# EAGLE board Underneath IR Matrix (EAGLE 9.6.2)
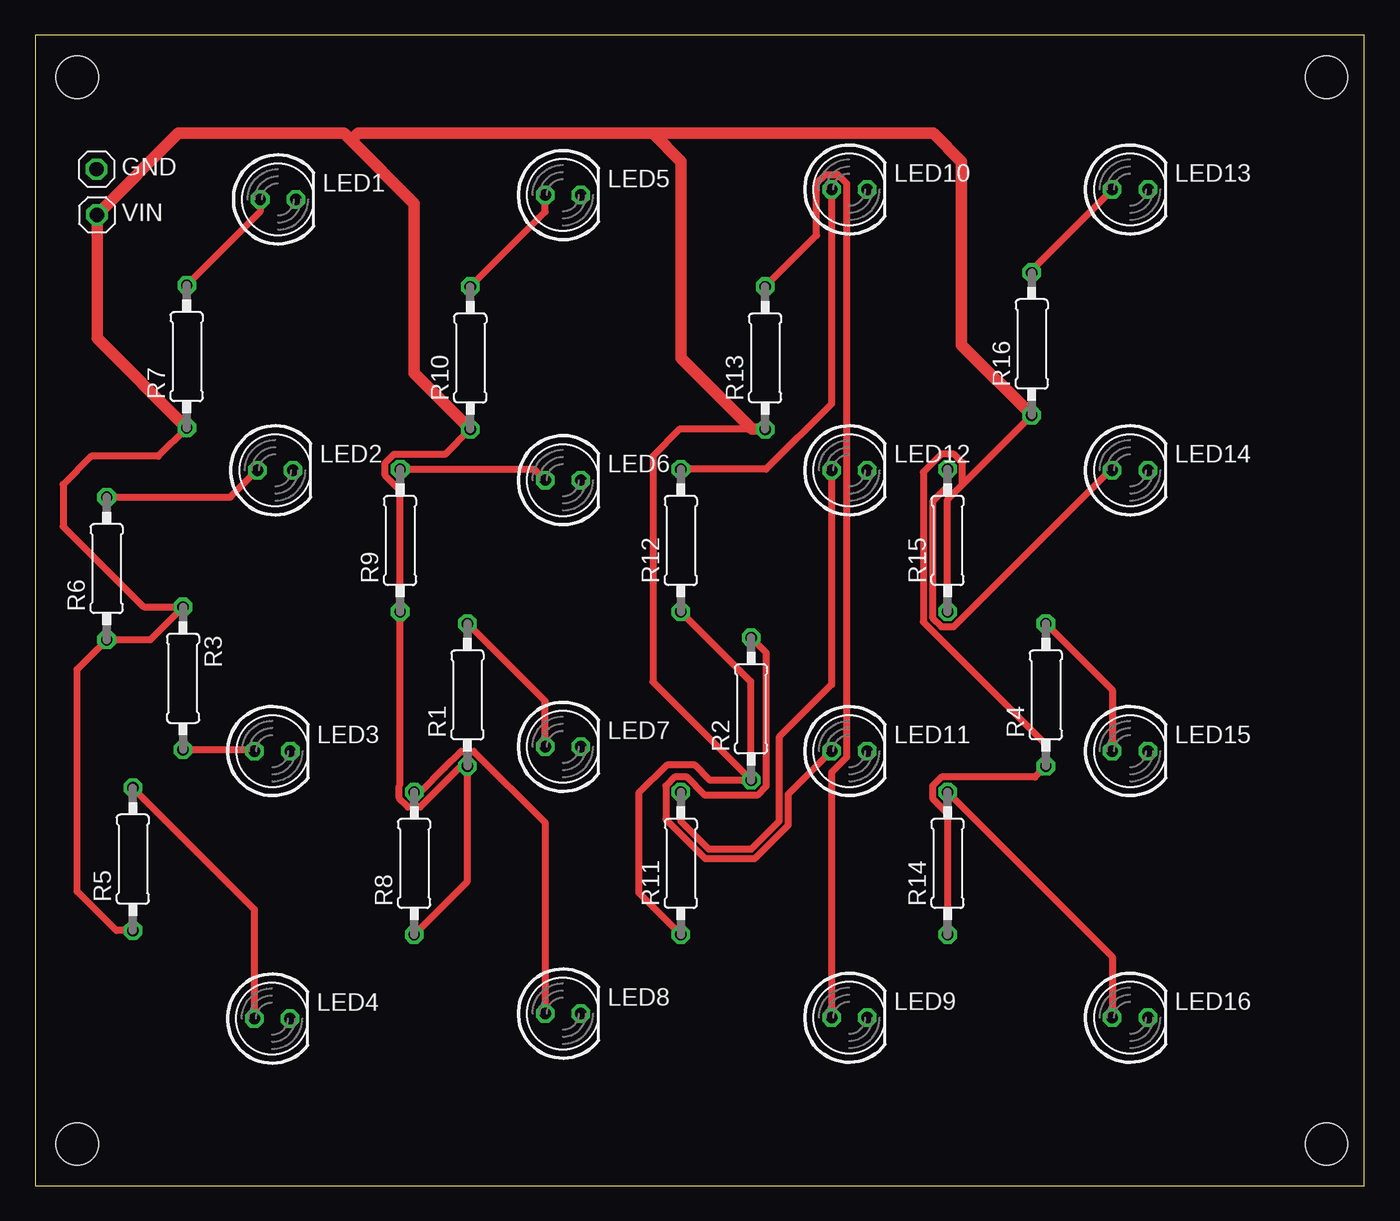
[diagram p0: board, top side]
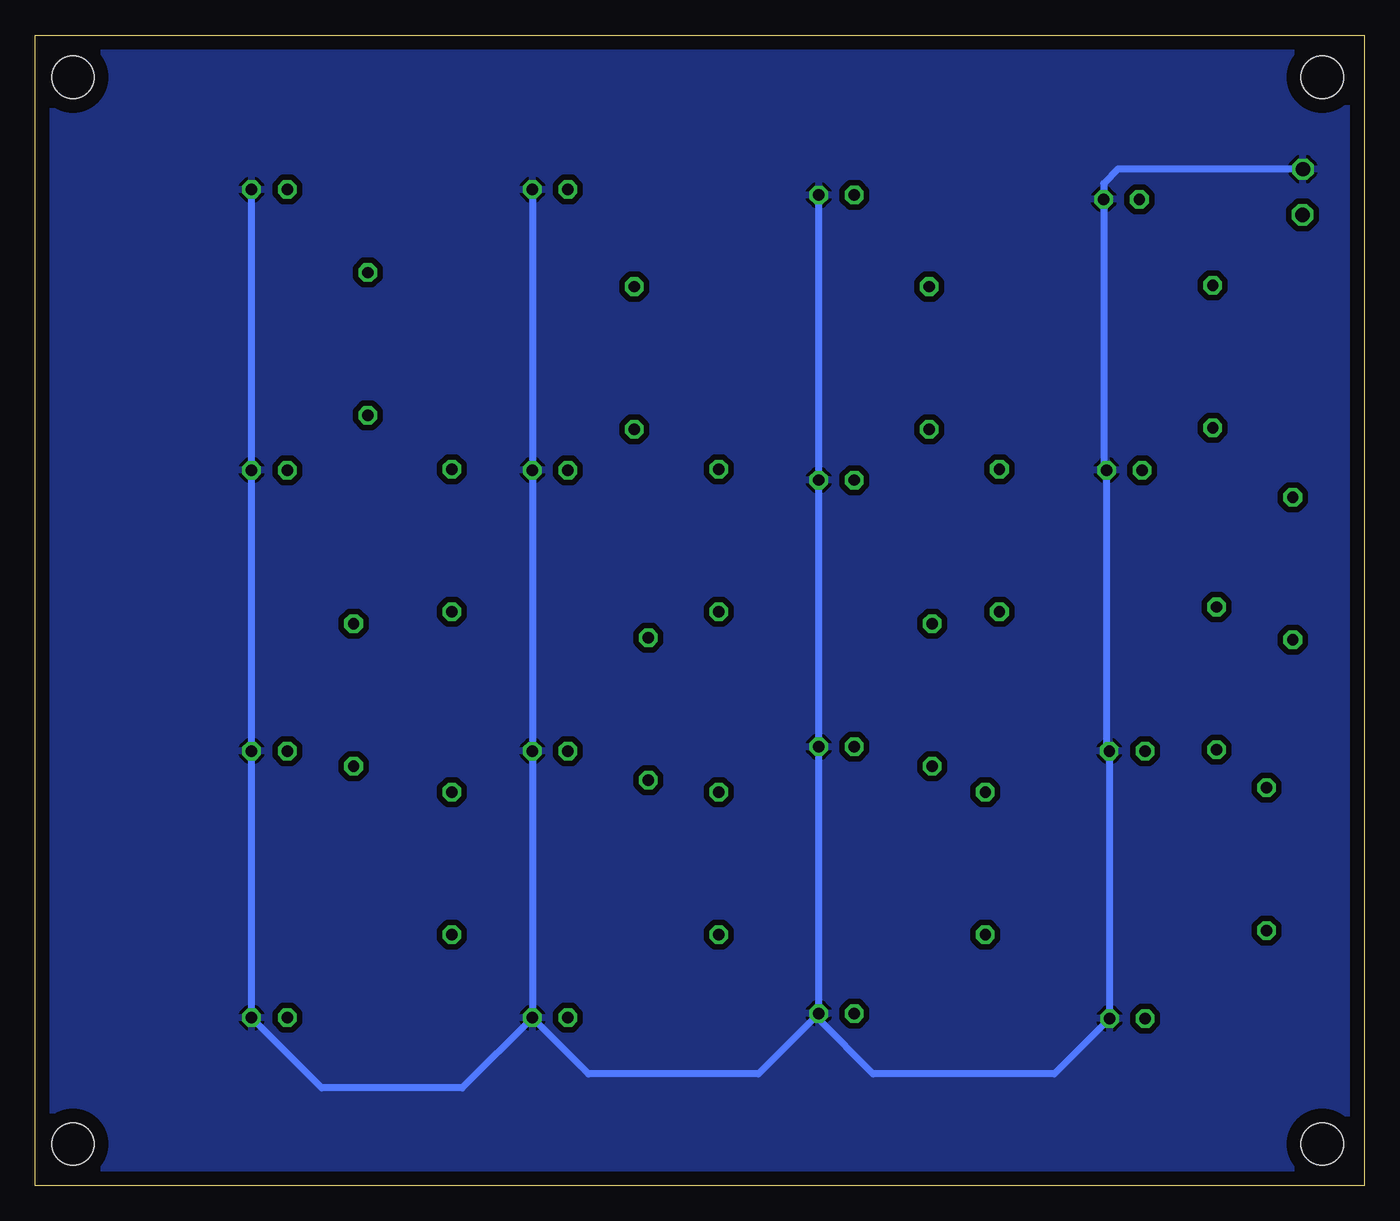
[diagram p1: board, bottom side, seen from below]

Size 94.69 x 81.97 mm. Coordinates in mm from the lower left corner, seen from the top.
Outline: 0,0 94.69,0 94.69,81.97 0,81.97 0,0
Copper layers (1*16): Top 0.035mm / dielectric 1.5mm / Bottom 0.035mm
Design rules "default": minimum track width 6mil, minimum drill 0.35mm, track to track 6mil, track to pad 6mil, pad to pad 6mil, via to via 6mil, smd to smd 6mil, copper to edge 40mil, drill to drill 6mil, minimum pad ring 10mil, minimum via ring 8mil, stop-mask expansion 4mil, vias tented up to drill 0mil, thermal gap 10mil
Holes 3 mm at 92,78.97 92,2.97 3,2.97 3,78.97

## Footprints (pad centres in the part's own frame; a part is rotated, then mirrored left to right if it is on the bottom)
1X01 = drill 1.016 octagon: 1 0,0
LED5MM = drill 0.813 octagon: A -1.27,0; K 1.27,0
0207/10 = drill 0.813 octagon: 1 -5.08,0; 2 5.08,0

## Placement (x,y rotation side)
GND  [1X01]  4.38,72.42 0 top
LED1  [LED5MM]  17.3,70.27 0 top
LED2  [LED5MM]  17.1,50.97 0 top
LED3  [LED5MM]  16.9,30.97 0 top
LED4  [LED5MM]  16.88,11.91 0 top
LED5  [LED5MM]  37.6,70.57 0 top
LED6  [LED5MM]  37.6,50.27 0 top
LED7  [LED5MM]  37.6,31.27 0 top
LED8  [LED5MM]  37.6,12.27 0 top
LED9  [LED5MM]  58,11.97 0 top
LED10  [LED5MM]  58,70.97 0 top
LED11  [LED5MM]  58,30.97 0 top
LED12  [LED5MM]  58,50.97 0 top
LED13  [LED5MM]  78,70.97 0 top
LED14  [LED5MM]  78,50.97 0 top
LED15  [LED5MM]  78,30.97 0 top
LED16  [LED5MM]  78,11.97 0 top
R1  100  [0207/10]  30.8,34.97 90 top
R2  100  [0207/10]  51,33.97 90 top
R3  100  [0207/10]  10.54,36.15 270 top
R4  100  [0207/10]  72,34.97 90 top
R5  100  [0207/10]  6.96,23.27 90 top
R6  100  [0207/10]  5.1,43.97 90 top
R7  100  [0207/10]  10.8,59.07 90 top
R8  100  [0207/10]  27,22.97 90 top
R9  100  [0207/10]  26,45.97 90 top
R10  100  [0207/10]  31,58.97 90 top
R11  100  [0207/10]  46,22.97 90 top
R12  100  [0207/10]  46,45.97 90 top
R13  100  [0207/10]  52,58.97 90 top
R14  100  [0207/10]  65,22.97 90 top
R15  100  [0207/10]  65,45.97 90 top
R16  100  [0207/10]  71,59.97 90 top
VIN  [1X01]  4.41,69.17 0 top

## Library data of the parts
GND VIN = pinhead
LED1-LED16 = led
R1-R16 = rcl; SPICEPREFIX: R

## Nets
N$1: LED5.A R10.2
N$2: LED6.A R9.2
N$3: LED4.A R5.2
N$4: LED8.A R8.2
N$5: LED7.A R1.2
N$6: LED1.A R7.2
N$7: LED2.A R6.2
N$8: LED12.A R11.2
N$9: GND.1 LED1.K LED2.K LED3.K LED4.K LED5.K LED6.K LED7.K LED8.K LED9.K LED10.K LED11.K LED12.K LED13.K LED14.K LED15.K LED16.K
N$10: R1.1 R2.1 R3.1 R4.1 R5.1 R6.1 R7.1 R8.1 R9.1 R10.1 R11.1 R12.1 R13.1 R14.1 R15.1 R16.1 VIN.1
N$11: LED15.A R4.2
N$12: LED3.A R3.2
N$13: LED9.A R13.2
N$14: LED10.A R12.2
N$15: LED11.A R2.2
N$16: LED13.A R16.2
N$17: LED14.A R15.2
N$18: LED16.A R14.2

## Tracks (layer width: path | path; a pad name or v marks a point on that pad's centre or on a via)
N$1
  Top 0.508: R10.2 36.33,69.38 LED5.A
N$2
  Top 0.508: R9.2 35.55,51.05 LED6.A
N$3
  Top 0.508: R5.2 15.61,19.7 LED4.A
N$4
  Top 0.508: R8.2 27.45,28.05 29.19,29.78 30.36,30.96 31.24,30.96 36.33,25.87 LED8.A
N$5
  Top 0.508: LED7.A 36.33,34.52 R1.2
N$6
  Top 0.508: LED1.A 16.03,69.38 R7.2
N$7
  Top 0.508: R6.2 13.91,49.05 LED2.A
N$8
  Top 0.508: LED12.A 56.73,35.7 53,31.97 53,25.97 51,23.97 48,23.97 46,25.97 R11.2
N$9
  Bottom 0.508: GND.1 17.55,72.42 18.57,71.4 LED1.K 18.57,51.17 LED2.K 18.37,31.17 LED3.K 18.17,11.93 LED4.K 22.09,7.97 35,7.97 38.87,11.84 LED8.K | LED8.K LED7.K LED6.K LED5.K | LED10.K LED12.K LED11.K LED9.K | LED9.K 64.27,6.97 74.27,6.97 LED16.K LED15.K LED14.K LED13.K | LED8.K 43.17,7.97 55.27,7.97 LED9.K
  pour Bottom (isolate 0.406): 0,81.97 95,81.97 95,-0.03 0,-0.03
N$10
  Top 0.508: R7.1 8.78,51.97 4,51.97 2,49.97 2,46.97 7.74,41.23 R3.1 8.2,38.89 R6.1 3,36.79 3,20.97 5.78,18.19 R5.1 | R8.1 30.8,21.69 R1.1 30.35,29.89 27.44,26.98 26.56,26.98 25.93,27.61 25.93,28.49 26,28.56 R9.1 26,49.54 24.93,50.61 24.93,51.49 25.56,52.12 29.23,52.12 R10.1 | R13.1 45.92,53.89 44,51.97 44,35.89 50.96,28.93 | 50.96,28.93 R2.1 48.08,28.89 47,29.97 45,29.97 43,27.97 43,20.89 R11.1 | R12.1 50.96,35.93 50.96,28.93 | R16.1 66.07,49.96 | R15.1 65,48.89 66.07,49.96 | 66.07,49.96 66.07,51.49 65.44,52.12 64.56,52.12 63.27,50.83 63.27,40.17 72,31.45 R4.1 71.23,29.12 64.56,29.12 63.93,28.49 63.93,27.61 65,26.54 R14.1
  Top 0.813: R7.1 4.41,60.38 VIN.1 10.21,74.97 22,74.97 22.5,74.47 | 22.5,74.47 27,69.97 27,57.89 R10.1 | 22.5,74.47 23,74.97 44,74.97 | 44,74.97 46,72.97 46,58.97 51.08,53.89 R13.1 | 44,74.97 64,74.97 66,72.97 66,59.89 R16.1
N$11
  Top 0.508: R4.2 76.73,35.32 LED15.A
N$12
  Top 0.508: R3.2 15.53,31.07 LED3.A
N$13
  Top 0.508: LED9.A 56.73,29.46 57.8,30.53 57.8,71.41 57.17,72.04 56.29,72.04 55.66,71.41 55.66,67.71 R13.2
N$14
  Top 0.508: LED10.A 56.73,55.7 52.08,51.05 R12.2
N$15
  Top 0.508: R2.2 52.07,37.98 52.07,28.45 51.44,27.82 47.73,27.82 46.44,29.12 45.56,29.12 44.93,28.49 44.93,26.1 47.73,23.31 51.27,23.31 53.66,25.7 53.66,27.9 LED11.A
N$16
  Top 0.508: LED13.A 71,65.24 R16.2
N$17
  Top 0.508: R15.2 65,49.82 63.93,48.76 63.93,40.45 64.56,39.82 65.44,39.82 76.59,50.97 LED14.A
N$18
  Top 0.508: R14.2 76.73,16.32 LED16.A